# Altium PCB PCB-MAKEY_MAKEY_PTITTEAM_v1.5.PcbDoc
Units mil, origin at the board's own origin, x right, y up, seen from the top; angles counter-clockwise.
Board outline 3500 x 2000 mil, 2 copper layers (Top Layer, Bottom Layer); 49 components, 59 nets, 156 pads, 45 vias.
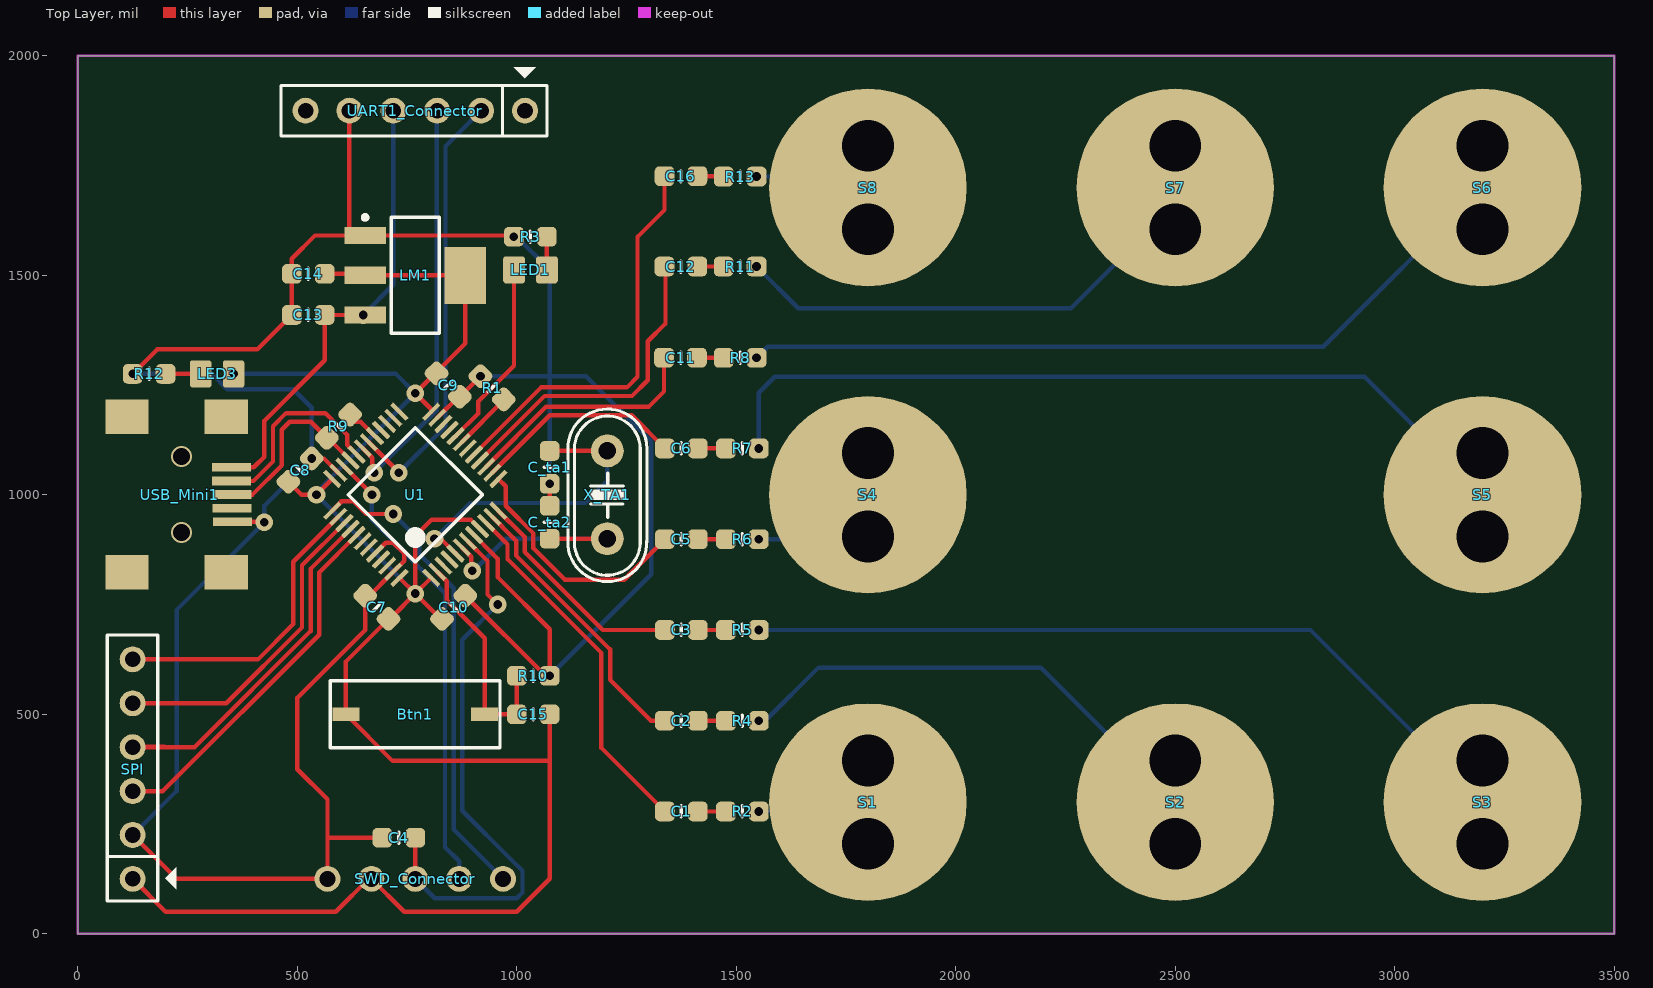
[diagram p0: Top Layer view]
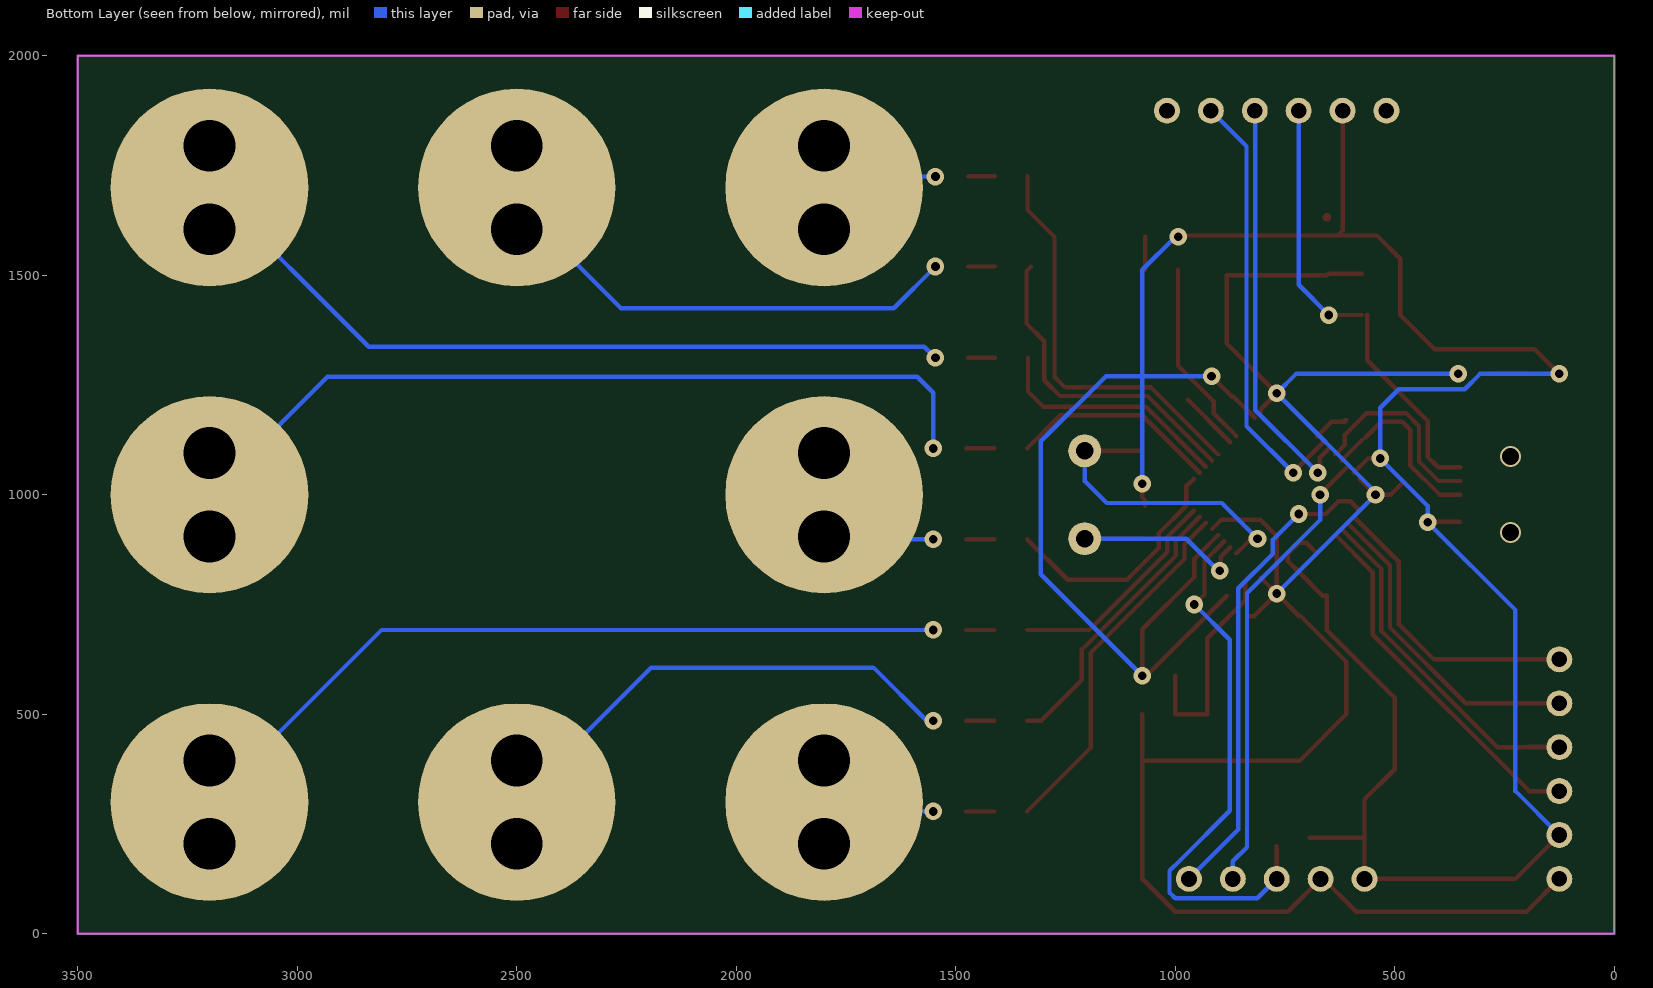
[diagram p1: Bottom Layer view, seen from below]

## Layer stack, top to bottom
Top Solder: solder mask 0.4, Solder Resist, Dk 3.5
Top Layer: signal copper 1.4
Dielectric1: dielectric 12.6, FR-4, Dk 4.8
Bottom Layer: signal copper 1.4
Bottom Solder: solder mask 0.4, Solder Resist, Dk 3.5

## Board outline
0,0 0,2000 3500,2000 3500,0 0,0

## Design rules (kind name [scope] priority, off if disabled: settings)
Clearance [All] p1: gap=9.68
PolygonConnect [All] p1: connectstyle=Relief reliefconductorwidth=10 reliefentries=4 polygonreliefangle="90 Angle" airgapwidth=10
RoutingVias [All] p1: holewidth=28 width=50 viastyle="Through Hole" minholewidth=28 minwidth=50 maxholewidth=28 maxwidth=50
SolderMaskExpansion [All] p1: expansion=4
Width [All] p1: maxlimit=10 minlimit=10 preferedwidth=10
30 further rules are at their usual default settings.

## Components (designator, comment, footprint, x,y, rotation, side; value= is the part's Value field where it differs from the comment)
Btn1 "Function" Button_SMD_2pin 768.75,500 r180 top
C1 "104" CAP-0603 1375,278.55 r0 top
C2 "104" CAP-0603 1375,485.31 r0 top
C3 "104" CAP-0603 1375,692.07 r0 top
C4 "104" CAP-0603 731.25,218.75 r180 top
C5 "104" CAP-0603 1375,898.83 r0 top
C6 "104" CAP-0603 1375,1105.59 r0 top
C7 "1uF" CAP-0603 681.25,743.75 r315 top
C8 "1uF" CAP-0603 506.25,1056.25 r45 top
C9 "1uF" CAP-0603 843.75,1250 r135 top
C10 "1uF" CAP-0603 856.25,743.75 r45 top
C11 "104" CAP-0603 1373,1312.35 r0 top
C12 "104" CAP-0603 1373.75,1520 r0 top
C13 "104" CAP-0603 525,1409.76 r0 top
C14 "104" CAP-0603 525,1503.51 r0 top
C15 "104" CAP-0603 1037.5,500 r0 top
C16 "104" CAP-0603 1374,1725.87 r0 top
C_ta1 "22pF" CAP-0603 1075,1062.5 r270 top
C_ta2 "22pF" CAP-0603 1075,937.5 r90 top
LED1 "color" LED-0805 1031.25,1512.5 r0 top
LED3 "color" LED-0805 317.44,1275.35 r180 top
LM1 "LM1117" SOT223-4N 768.75,1500 r0 top
R1 "0R" RES-0603 943.75,1243.75 r315 top
R2 "0R" RES-0603 1513.75,278.55 r0 top
R3 "1k2" RES-0603 1031,1588 r0 top
R4 "0R" RES-0603 1513.75,485 r0 top
R5 "0R" RES-0603 1513.75,692.07 r0 top
R6 "0R" RES-0603 1513.75,898.83 r0 top
R7 "0R" RES-0603 1513.75,1105.59 r0 top
R8 "0R" RES-0603 1508.75,1312 r0 top
R9 "1k5" RES-0603 593.75,1156.25 r45 top
R10 "10k" RES-0603 1037.5,587.5 r180 top
R11 "0R" RES-0603 1508.75,1520 r0 top
R12 "1k2" RES-0603 162.44,1275.35 r0 top
R13 "0R" RES-0603 1508.75,1725 r0 top
S1 "C_Sensor" SOP2 1800,300 r0 top
S2 "C_Sensor" SOP2 2500,300 r0 top
S3 "C_Sensor" SOP2 3200,300 r0 top
S4 "C_Sensor" SOP2 1800,1000 r0 top
S5 "C_Sensor" SOP2 3200,1000 r0 top
S6 "C_Sensor" SOP2 3200,1700 r0 top
S7 "C_Sensor" SOP2 2500,1700 r0 top
S8 "C_Sensor" SOP2 1800,1700 r0 top
SPI "" JP6 125,125 r90 top
SWD_Connector "" JP_5 768.75,125 r180 top
U1 "STM32F103C8T6" LQFP48_N 768.75,1000 r135 top
UART1_Connector "Connector" JP6 1018.75,1875 r180 top
USB_Mini1 "" Micro_USB 350,1062.5 r270 top
X_TA1 "8Mhz" XT2 1206.25,1000 r90 top

## Footprints (in the part's own frame and the unit in brackets; to place one, negate y for a bottom-side part, rotate by r counter-clockwise, add the part's x,y. Pads: shape width x height; smd on the part's side, far side on the other; paste and mask are expansions set on the pad)
Button_SMD_2pin [mm] "Button smd 2pin"
  rect 1.55x0.8 smd: 1(-4.013,0) 2(4.013,0)
  silkscreen extent -4.9,-1.93 4.93,1.93, body extent -4.05,-1.8 3.95,1.8, height 2.53
CAP-0603 [mil] "Chip Capacitor; Body 2 x 1.2 mm (LxW typ)"
  rrect50% 45x45 smd: 1(-37.5,0) 2(37.5,0)
  silkscreen extent 0,-12 0,13, body extent -39,-24 39,24, height 28
JP6 [mm] "JP6"
  round 1.5 hole 0.9: 1(0,0) 2(2.54,0) 3(5.08,0) 4(7.62,0) 5(10.16,0) 6(12.7,0)
  silkscreen extent -1.27,-2.51 14.12,1.47, body extent -1.22,-1.27 13.92,1.23, height 8.22
JP_5 [mm]
  round 1.5 hole 0.914: 1(-5.08,0) 2(-2.54,0) 3(0,0) 4(2.54,0) 5(5.08,0)
  body extent -6.3,-1.36 6.3,1.14, height 8.22
LED-0805 [mil] "Chip LED; Body 2 x 1.2 mm (LxW typ)"
  rrect25% 49.27x61.77 smd: 1(-37.5,0) 2(37.5,0)
  body extent -39,-25 39,25, height 31
LQFP48_N [mm] "Thin QFP, 48-Leads, Body 7x7mm, Pitch 0.5mm, IPC Medium Density"
  rrect25% 1.27x0.254 smd: 1(-4.05,2.75) 2(-4.05,2.25) 3(-4.05,1.75) 4(-4.05,1.25) 5(-4.05,0.75) 6(-4.05,0.25) 7(-4.05,-0.25) 8(-4.05,-0.75) 9(-4.05,-1.25) 10(-4.05,-1.75) 11(-4.05,-2.25) 12(-4.05,-2.75) 25(4.05,-2.75) 26(4.05,-2.25) 27(4.05,-1.75) 28(4.05,-1.25) 29(4.05,-0.75) 30(4.05,-0.25) 31(4.05,0.25) 32(4.05,0.75) 33(4.05,1.25) 34(4.05,1.75) 35(4.05,2.25) 36(4.05,2.75)
  rrect25% 0.254x1.27 smd: 13(-2.75,-4.05) 14(-2.25,-4.05) 15(-1.75,-4.05) 16(-1.25,-4.05) 17(-0.75,-4.05) 18(-0.25,-4.05) 19(0.25,-4.05) 20(0.75,-4.05) 21(1.25,-4.05) 22(1.75,-4.05) 23(2.25,-4.05) 24(2.75,-4.05) 37(2.75,4.05) 38(2.25,4.05) 39(1.75,4.05) 40(1.25,4.05) 41(0.75,4.05) 42(0.25,4.05) 43(-0.25,4.05) 44(-0.75,4.05) 45(-1.25,4.05) 46(-1.75,4.05) 47(-2.25,4.05) 48(-2.75,4.05)
  silkscreen extent -2.75,-2.75 2.75,2.75, body extent -3.5,-3.5 3.5,3.5, height 1.6
Micro_USB [mm] "Micro usb connector"
  rect 2x2.5 smd: 0(-2.929,-6.045) 0(-2.925,-0.305) 0(6.071,-6.045) 0(6.075,-0.305)
  rect 0.5x2.25 smd: 1(0,0) 2(0.787,0.013) 3(1.575,0.025) 4(2.362,0.038) 5(3.15,0.051)
  body extent -3.78,-8.83 6.92,0.37, height 3.95
RES-0603 [mil] "Chip Resistor; Body 2 x 1.2 mm (LxW typ)"
  rrect50% 45x45 smd: 1(-37.5,0) 2(37.5,0)
  silkscreen extent 0,-12 0,12, body extent -39,-24 39,24, height 28
SOP2 [mil]
  round 450 all layers, no hole: 1(0,0)
SOT223-4N [mm]
  rect 2.4x1 smd: 1(-2.9,2.3) 2(-2.9,0) 3(-2.9,-2.3)
  rect 2.4x3.3 smd: 4(2.9,0)
  Top Layer circle w0.25: c-2.9,3.35 r0.125
  silkscreen extent -3.02,-3.35 1.4,3.47, body extent -3.39,-3.27 3.5,3.23, height 1.72
XT2 [mm] "Footpin for Crystal 2 pin"
  round 1.905 hole 1: 1(-2.54,0) 2(2.54,0)
  silkscreen extent -5.03,-2.29 4.96,2.29, body extent -5.93,-2.36 5.42,2.29, height 3.5

## Part data
Btn1: library part Button_SMD_2pin, "Switch button 2 pin"
C1 C2 C3 C4 C5 C6 C9 C10 C11 C13 C14 C15: library part CM, "Cap SMD"
C7 C8 C12 C16 C_ta1 C_ta2: library part CN0, "Cremic For Xtal 1pF => 100pF"
LED1 LED3: library part Led_SMD, "Led smd"
LM1: "3v3"
R1 R2 R3 R4 R5 R6 R7 R8 R10 R11 R12 R13: library part Res_SMD_0603, "Resistor smd 0603 type"
R9: library part R, "Resistor 1/4W"
SPI: library part SPI_Connector
SWD_Connector: library part Load_Program
U1: "STM32 ARM-based 32-bit MCU with 64 Kbytes Flash, 48-pin LQFP, Industrial Temperature"
UART1_Connector: library part USB2Com_Conn, "Connector to USB2Com module"
USB_Mini1: library part USB_M
X_TA1: library part XT2, "Crystal For all Crystal 2pin."

## Via types
v1: diameter 40, hole 19.68, Top Layer to Bottom Layer, tented both sides, 27 vias
v2: diameter 130, hole 118.11, Top Layer to Bottom Layer, 16 vias
v3: diameter 47.24, hole 39.37, Top Layer to Bottom Layer, tented both sides, 2 vias

## Nets (pads, with @x,y where several pads share a name; then routed paths per layer and width w, separated by ;. In a path a pad name is that pad's centre, name@x,y a point inside that pad or via, vN(x,y) a via of type N, cw(c..) or ccw(c..) an arc to the next point about the centre after c; other vN are vias at no path point)
GND: C4.2 C7.1 C8.2 C9.1 C10.2 C13.1 C14.1 C_ta1.2 C_ta2.2 LM1.1 R1.1 R3.1 R10.1 R12.1 SPI.2 SWD_Connector.5 U1.8 U1.23 U1.35 U1.44 U1.47 UART1_Connector.5 USB_Mini1.5 | length 7203.9
  Top Layer w10: v1(124.94,1275.35) 180.84,1331.25 408.99,1331.25 C13.1 C14.1 487.5,1537.5 540.55,1590.55 LM1.1 ; SPI.2 225,125 SWD_Connector.5 568.75,218.75 ; USB_Mini1.5 424,938.5 v1(425,937.5) ; v1(532.77,1082.77) 560.71,1082.77 U1.35 ; UART1_Connector.5 618.75,1602.25 630.45,1590.55 LM1.1 ; U1.44 701.5,891 718,891 744,865 744,849.98 U1.47 712.88,818.86 664.3,770.27 C7.1 654.73,692.03 500,537.3 500,375 568.75,306.25 568.75,218.75 ; C4.2 568.75,218.75 ; U1.23 866.96,1223.48 C9.1 870.45,1223.48 v1(917.23,1270.27) ; C10.2 1065.53,587.5 v1(1075,587.5) 1075,693.75 956.25,812.5 956.25,854.25 945.88,864.62 ; U1.8 945.88,864.63 ; v1(993.5,1588) 990.95,1590.55 LM1.1 ; C_ta2.2@1068.75,975 1068.75,987.5 1075,993.75 C_ta1.2@1075,1006.25
  Bottom Layer w10: v1(124.94,1275.35) 305.9,1275.35 340.58,1240.67 490.58,1240.67 532.77,1198.48 v1(532.77,1082.77) 425,975 v1(425,937.5) 225,737.5 225,325 SPI.2 ; v1(917.23,1270.27) 1075,1270.27 ; v1(993.5,1588) 999.5,1588 1075,1512.5 1075,1270.27 ; v1(1075,587.5) 1306.25,818.75 1306.25,1121.75 1157.73,1270.27 1075,1270.27 ; v1(1075,1025) 1075,1270.27
NetC1_2: C1.2 R2.1 | length 63.8
  Top Layer w10: C1.2 R2.1
NetC2_2: C2.2 R4.1 | length 63.9
  Top Layer w10: C2.2 1475.94,485.31 R4.1
NetC3_2: C3.2 R5.1 | length 63.8
  Top Layer w10: C3.2 R5.1
NetC5_2: C5.2 R6.1 | length 63.8
  Top Layer w10: C5.2 R6.1
NetC6_2: C6.2 R7.1 | length 63.8
  Top Layer w10: C6.2 R7.1
NetC11_2: C11.2 R8.1 | length 60.9
  Top Layer w10: C11.2 1470.9,1312.35 R8.1
NetC12_2: C12.2 R11.1 | length 60
  Top Layer w10: C12.2 R11.1
NetC16_2: C16.2 R13.1 | length 60.1
  Top Layer w10: C16.2 1470.38,1725.87 R13.1
NetLED1_2: LED1.2 R3.2 | length 75.6
  Top Layer w10: R3.2 1068.5,1512.75 LED1.2
NetLED3_2: LED3.2 R12.2 | length 80
  Top Layer w10: R12.2 LED3.2
NetR2_2: R2.2 S1.1 | length 257.6
  Bottom Layer w10: v1(1551.25,278.55) 1778.55,278.55 S1.1
  other v2: 1800,205 1800,395
NetR4_2: R4.2 S2.1 | length 1125.8
  Bottom Layer w10: v1(1551.25,485) 1566.25,485 1687.5,606.25 2193.75,606.25 S2.1
  other v2: 2500,205 2500,395
NetR5_2: R5.2 S3.1 | length 1811.1
  Bottom Layer w10: v1(1551.25,692.07) 2807.93,692.07 S3.1
  other v2: 3200,205 3200,395
NetR6_2: R6.2 S4.1 | length 290.7
  Bottom Layer w10: v1(1551.25,898.83) 1698.83,898.83 S4.1
  other v2: 1800,905 1800,1095
NetR7_2: R7.2 S5.1 | length 1902
  Bottom Layer w10: v1(1551.25,1105.59) 1551.25,1232.5 1587.5,1268.75 2931.25,1268.75 S5.1
  other v2: 3200,905 3200,1095
NetR8_2: R8.2 S6.1 | length 1814.5
  Bottom Layer w10: v1(1546.25,1312) 1571.75,1337.5 2837.5,1337.5 S6.1
  other v2: 3200,1605 3200,1795
NetR11_2: R11.2 S7.1 | length 1129
  Bottom Layer w10: v1(1546.25,1520) 1641.25,1425 2262.5,1425 2500,1662.5 S7.1
  other v2: 2500,1605 2500,1795
NetR13_2: R13.2 S8.1 | length 264.1
  Bottom Layer w10: v1(1546.25,1725) 1775,1725 S8.1
  other v2: 1800,1605 1800,1795
NRST: C4.1 SWD_Connector.3 U1.7 | length 1261.5
  Top Layer w10: SWD_Connector.3 C4.1@768.75,200 ; U1.7 933.36,849.31 933.36,772.89 v1(956.25,750)
  Bottom Layer w10: SWD_Connector.3 812.98,80.77 1000,80.77 1012.96,93.73 1012.96,143.31 987.06,169.21 875.93,280.32 875.93,669.68 v1(956.25,750)
OSC_IN: C_ta1.1 U1.5 X_TA1.2 | length 711.7
  Top Layer w10: v1(812.5,900) 814.5,900 820.75,906.25 854.86,872.13 U1.5 ; C_ta1.1 X_TA1.2@1200,1100
  Bottom Layer w10: v1(812.5,900) 893.75,981.25 1156.25,981.25 1206.25,1031.25 1206.25,1093.75 X_TA1.2@1200,1100
OSC_OUT: C_ta2.1 U1.6 X_TA1.1 | length 523.6
  Top Layer w10: U1.6 895.99,858.84 895.99,829.79 v1@897.98,827.8 ; C_ta2.1 X_TA1.1@1200,900
  Bottom Layer w10: v1(898.68,827.11) 898.68,823.68 975,900 X_TA1.1@1200,900
PA0: C1.1 U1.10 | length 826.1
  Top Layer w10: U1.10 978.78,887.41 978.78,853.55 1192.82,639.51 1192.82,423.23 C1.1
PA1: C2.1 U1.11 | length 646.2
  Top Layer w10: U1.11 992.21,901.81 998.46,895.56 998.46,861.71 1212.5,647.67 1212.5,578.42 1305.61,485.31 C2.1
PA2: C3.1 U1.12 | length 511.8
  Top Layer w10: U1.12 1011.89,909.97 1018.14,903.71 1018.14,869.86 1195.93,692.07 C3.1
PA3: C5.1 U1.13 | length 559
  Top Layer w10: U1.13 974.7,1019.55 974.7,975 1037.82,911.88 1037.82,878.01 1109.58,806.25 1244.92,806.25 C5.1
PA4: C6.1 U1.14 | length 479
  Top Layer w10: U1.14 1075.27,1181.25 1261.84,1181.25 C6.1
PA5: C11.1 U1.15 | length 553.2
  Top Layer w10: U1.15 1067.12,1200.93 1300.93,1200.93 1335.5,1235.5 C11.1
PA6: C12.1 U1.16 | length 736.6
  Top Layer w10: U1.16 1063.35,1225 1262.5,1225 1298.32,1260.82 1298.32,1349.53 1338.75,1389.96 1338.75,1509.86 C12.1@1329.5,1519.11
PA7: C16.1 U1.17 | length 928.5
  Top Layer w10: U1.17 1055.18,1244.68 1250.93,1244.68 1275,1268.75 1275,1587.5 1336.5,1649 C16.1
PA13: SWD_Connector.2 U1.34 | length 1049.1
  Top Layer w10: U1.34 671.31,1000 v1(670.03,1000)
  Bottom Layer w10: v1(670.03,1000) 670.03,942.47 836.57,775.93 836.57,197.17 868.75,164.99 SWD_Connector.2
PA14: SWD_Connector.1 U1.37 | length 1095.5
  Top Layer w10: U1.37 600,984.36 600,985.27 628.19,985.27 657.21,956.25 v1(718.75,956.25)
  Bottom Layer w10: v1(718.75,956.25) 777.82,897.18 777.82,865.32 856.25,786.89 856.25,237.5 SWD_Connector.1
PA15: SPI.6 U1.38 | length 686
  Top Layer w10: SPI.6 410.26,625 490.96,705.71 490.96,847.48 U1.38
PB0: U1.18
PB1: R1.2 U1.19 | length 136.7
  Top Layer w10: U1.19 R1.2@971.17,1216.34
PB2: LED1.1 U1.20 | length 434
  Top Layer w10: U1.20 912.11,1185.12 912.11,1212.56 993.75,1294.2 LED1.1
PB3: SPI.5 U1.39 | length 735.6
  Top Layer w10: SPI.5 338.09,525 510.64,697.55 510.64,839.32 U1.39
PB4: SPI.4 U1.40 | length 858.1
  Top Layer w10: 197.75,425.59 125.59,425.59 SPI.4 265.92,425 530.32,689.4 530.32,831.17 U1.40
PB5: SPI.3 U1.41 | length 834.7
  Top Layer w10: SPI.3 193.75,325 550,681.25 550,823.01 U1.41
PB6: U1.42
PB7: U1.43
PB8: U1.45
PB9: U1.46
PB10: U1.21
PB11: U1.22
PB12: U1.25
PB13: U1.26
PB14: U1.27
PB15: U1.28
PC13: Btn1.1 C15.1 R10.2 U1.2 | length 530.1
  Top Layer w10: U1.2 840.32,803.15 840.32,759.68 926.75,673.25 Btn1.1 C15.1 R10.2
PC14: U1.3
PC15: U1.4
USART1_RX: U1.31 UART1_Connector.3 | length 951.1
  Top Layer w10: U1.31 670.5,1084.32 670.5,1054.5 v1(675,1050)
  Bottom Layer w10: v1(675,1050) 817.82,1192.82 817.82,1874.07 UART1_Connector.3
USART1_TX: U1.30 UART1_Connector.2 | length 1000.7
  Top Layer w10: U1.30 731.25,1051.41 v1(731.25,1050)
  Bottom Layer w10: v1(731.25,1050) 837.5,1156.25 837.5,1793.75 UART1_Connector.2
USB_5V: C13.2 LM1.3 UART1_Connector.4 USB_Mini1.1 | length 1038.6
  Top Layer w10: USB_Mini1.1 400.59,1062.5 425,1086.91 425,1168.75 562.5,1306.25 C13.2 C13.2@562.81,1409.45 ; C13.2@575.31,1409.45 v1(650,1409.45) LM1.3
  Bottom Layer w10: v1(650,1409.45) 718.75,1478.2 UART1_Connector.4
USB_DISC: R9.2 U1.29 | length 80.5
  Top Layer w10: R9.2@609.76,1170.27 R9.2@614.02,1170.27 ; R9.2@614.02,1166.01 644.5,1166.01 U1.29
USBDM: U1.32 USB_Mini1.2 | length 448.2
  Top Layer w10: USB_Mini1.2 400.25,1031.5 444.68,1075.93 444.68,1156.25 474.51,1186.08 563.92,1186.08 613.67,1136.33 613.67,1113.33 U1.32
USBDP: R9.1 U1.33 USB_Mini1.3 | length 413.6
  Top Layer w10: USB_Mini1.3 397.92,1000.5 464.36,1066.94 464.36,1148.1 482.67,1166.4 530.56,1166.4 R9.1 ; R9.1@574.58,1124.58 U1.33
VCC: Btn1.2 C7.2 C8.1 C9.2 C10.1 C14.2 C15.2 LED3.1 LM1.2 LM1.4 SPI.1 SWD_Connector.4 U1.1 U1.9 U1.24 U1.36 U1.48 | length 4665.4
  Top Layer w10: SPI.1 200,50 587.5,50 665.63,128.12 743.75,50 1000,50 1075,125 C15.2 ; C8.1 509.47,1000 v1(543.75,1000) 579.45,1035.7 U1.36 ; C14.2@575,1503.51 651.07,1503.51 LM1.2 LM1.4 882.92,1345.42 v1(768.75,1231.25) 804.94,1195.06 U1.24 ; C7.2 610.75,620.22 Btn1.2 717,393.75 1075,393.75 ; C7.2@714.02,723.48 717.23,723.48 v1(768.75,775) ; U1.48 733.05,810.7 v1(768.75,775) ; U1.1 804.45,810.7 v1(768.75,775) ; C10.1@829.73,723.48 820.27,723.48 v1(768.75,775) ; U1.9 894.85,943.51 806.01,943.51 768.75,906.25 v1(768.75,775)
  Bottom Layer w10: v1(354.94,1275.35) 724.65,1275.35 v1(768.75,1231.25) 543.75,1006.25 v1(543.75,1000) v1(768.75,775)
pads on no net: UART1_Connector.1 UART1_Connector.6 USB_Mini1.0 USB_Mini1.4
copper on no net:
  other v3: 236.43,913.89 236.43,1087.11

## Keep-outs
Keep-Out Layer:
  the board outline again, w5

## Silkscreen, mask and mechanical layers (free items; w line width, h text height)
Mechanical 13:
  lines w10: 0,125 3500,125 ; 0,250 3493.75,250 ; 0,500 3500,500 ; 0,750 3500,750 ; 0,1000 18.75,1000 3500,1000 ; 0,1250 3500,1250 ; 0,1500 3500,1500 ; 0,1750 3500,1750 ; 0,1875 3500,1875